# Allegro board ANALYSIS_0218_3.brd
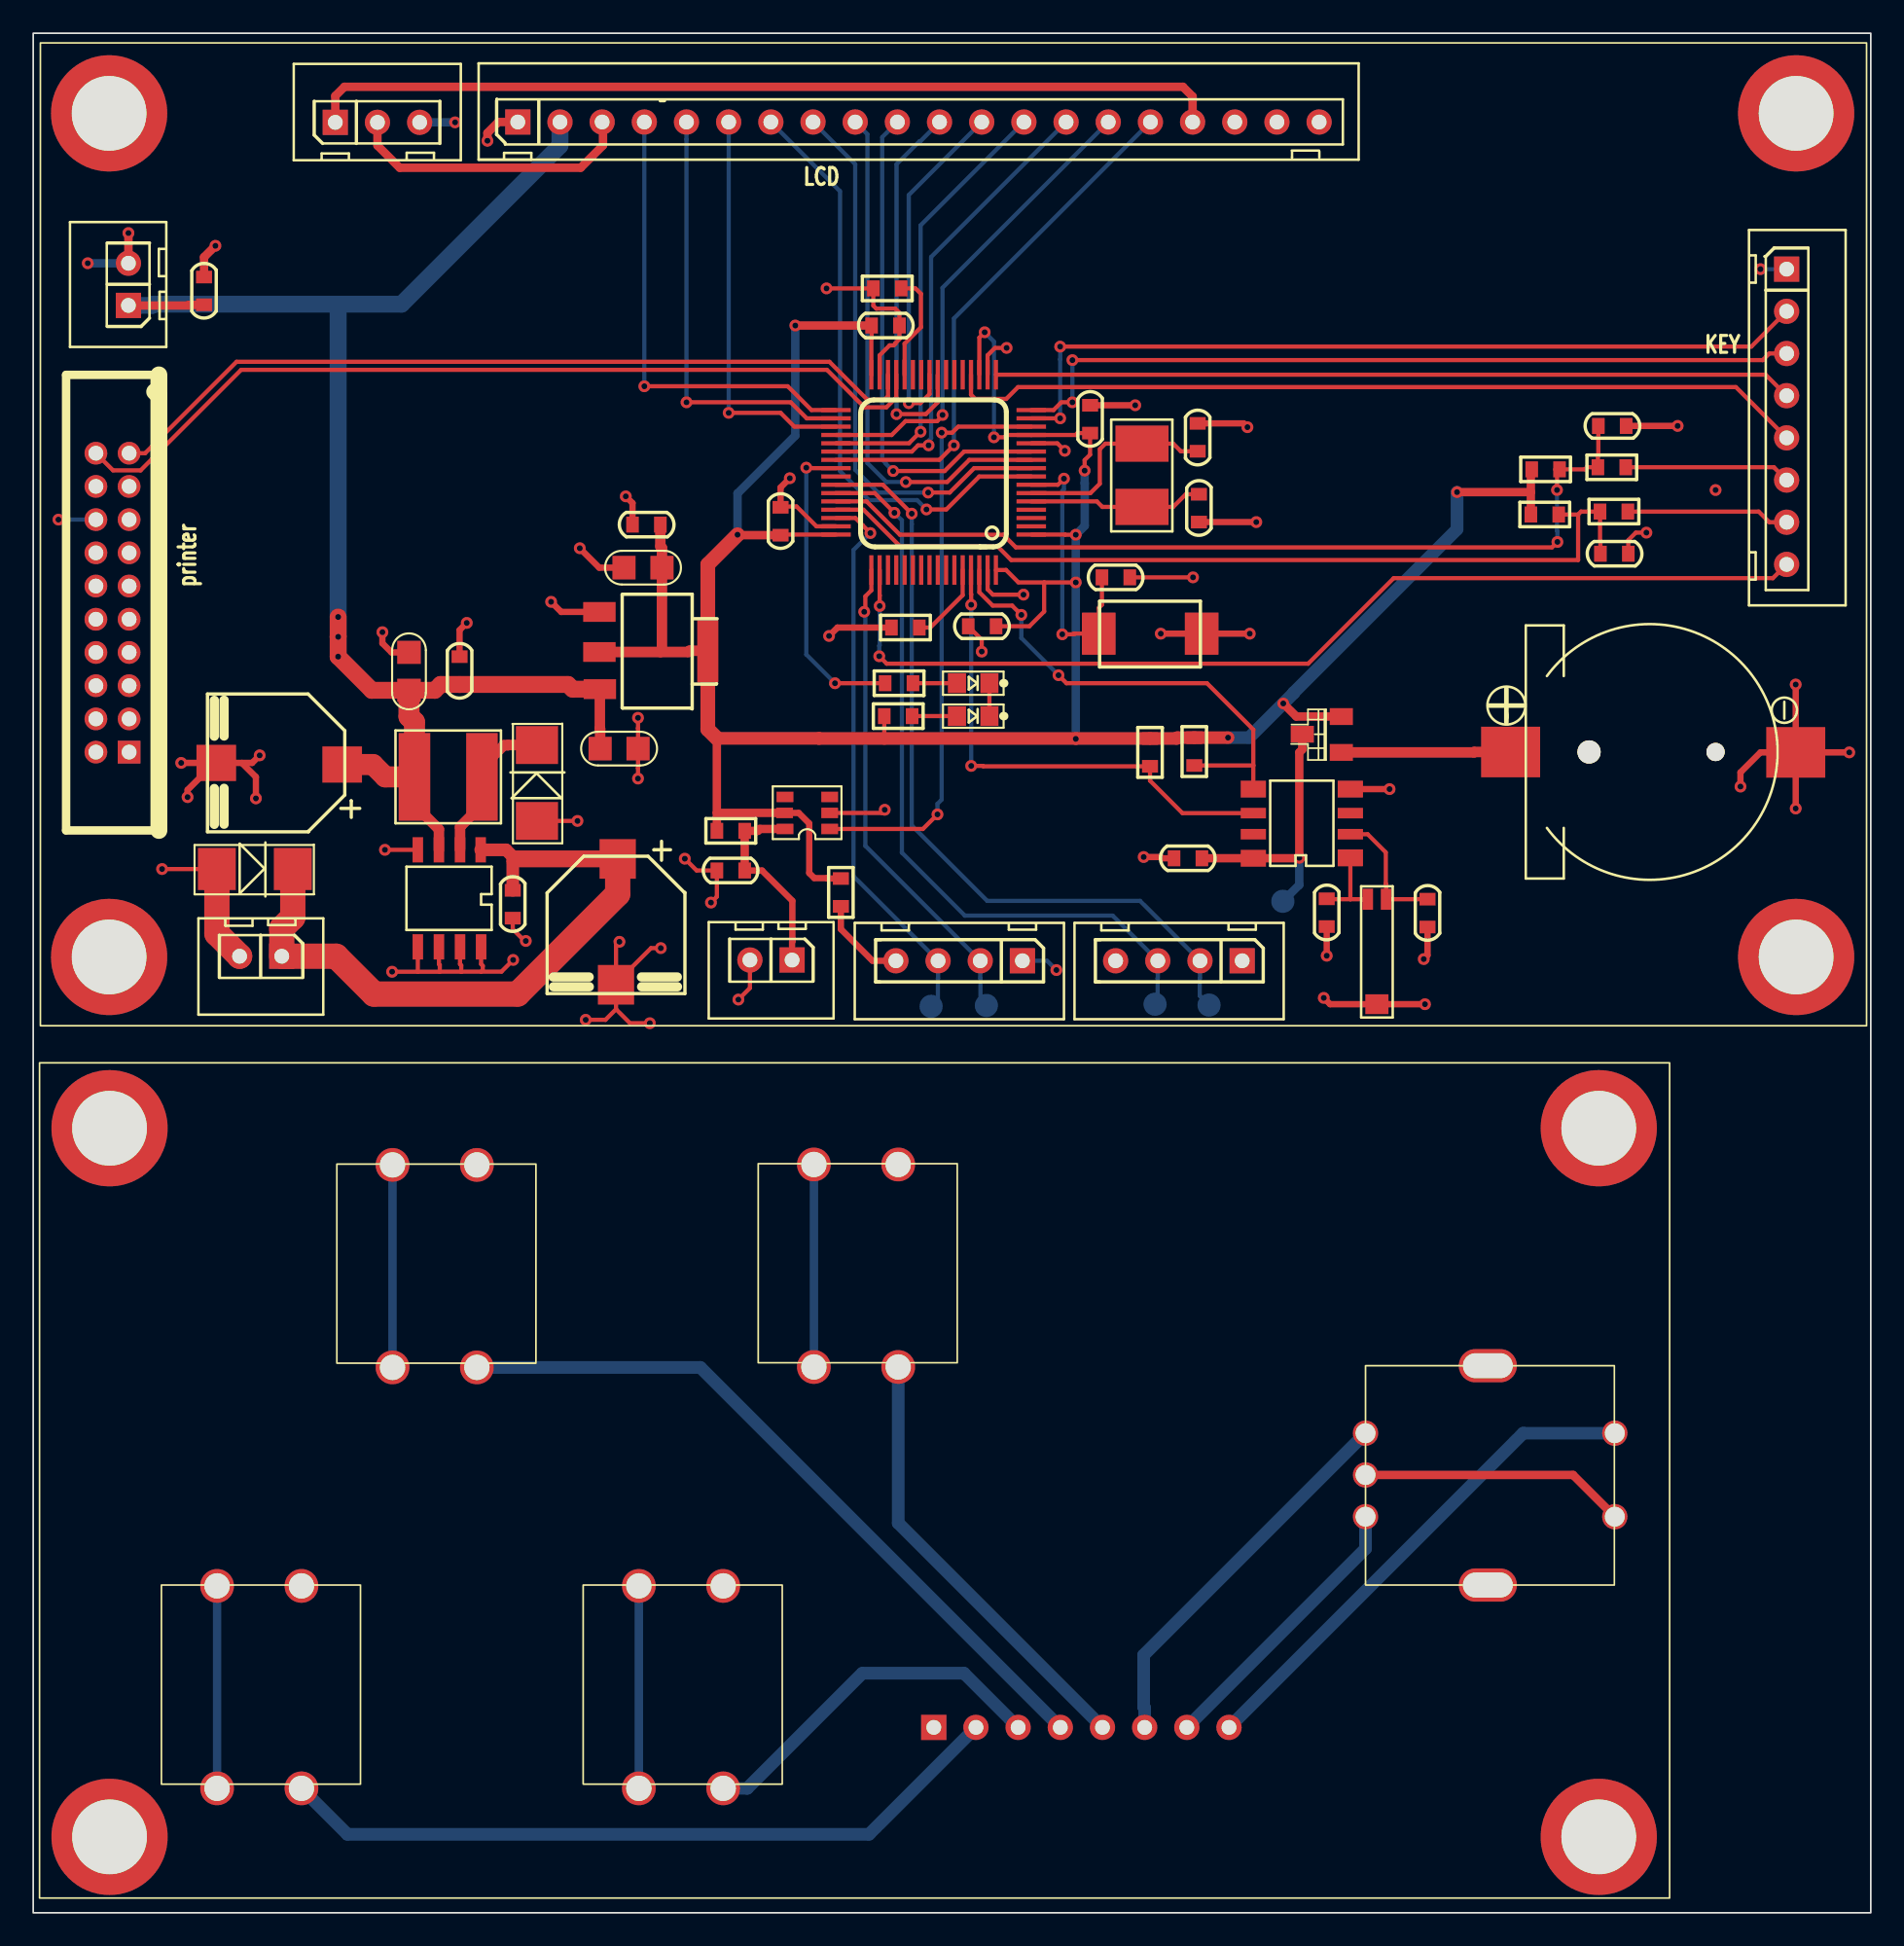
[diagram p0: board, top side]
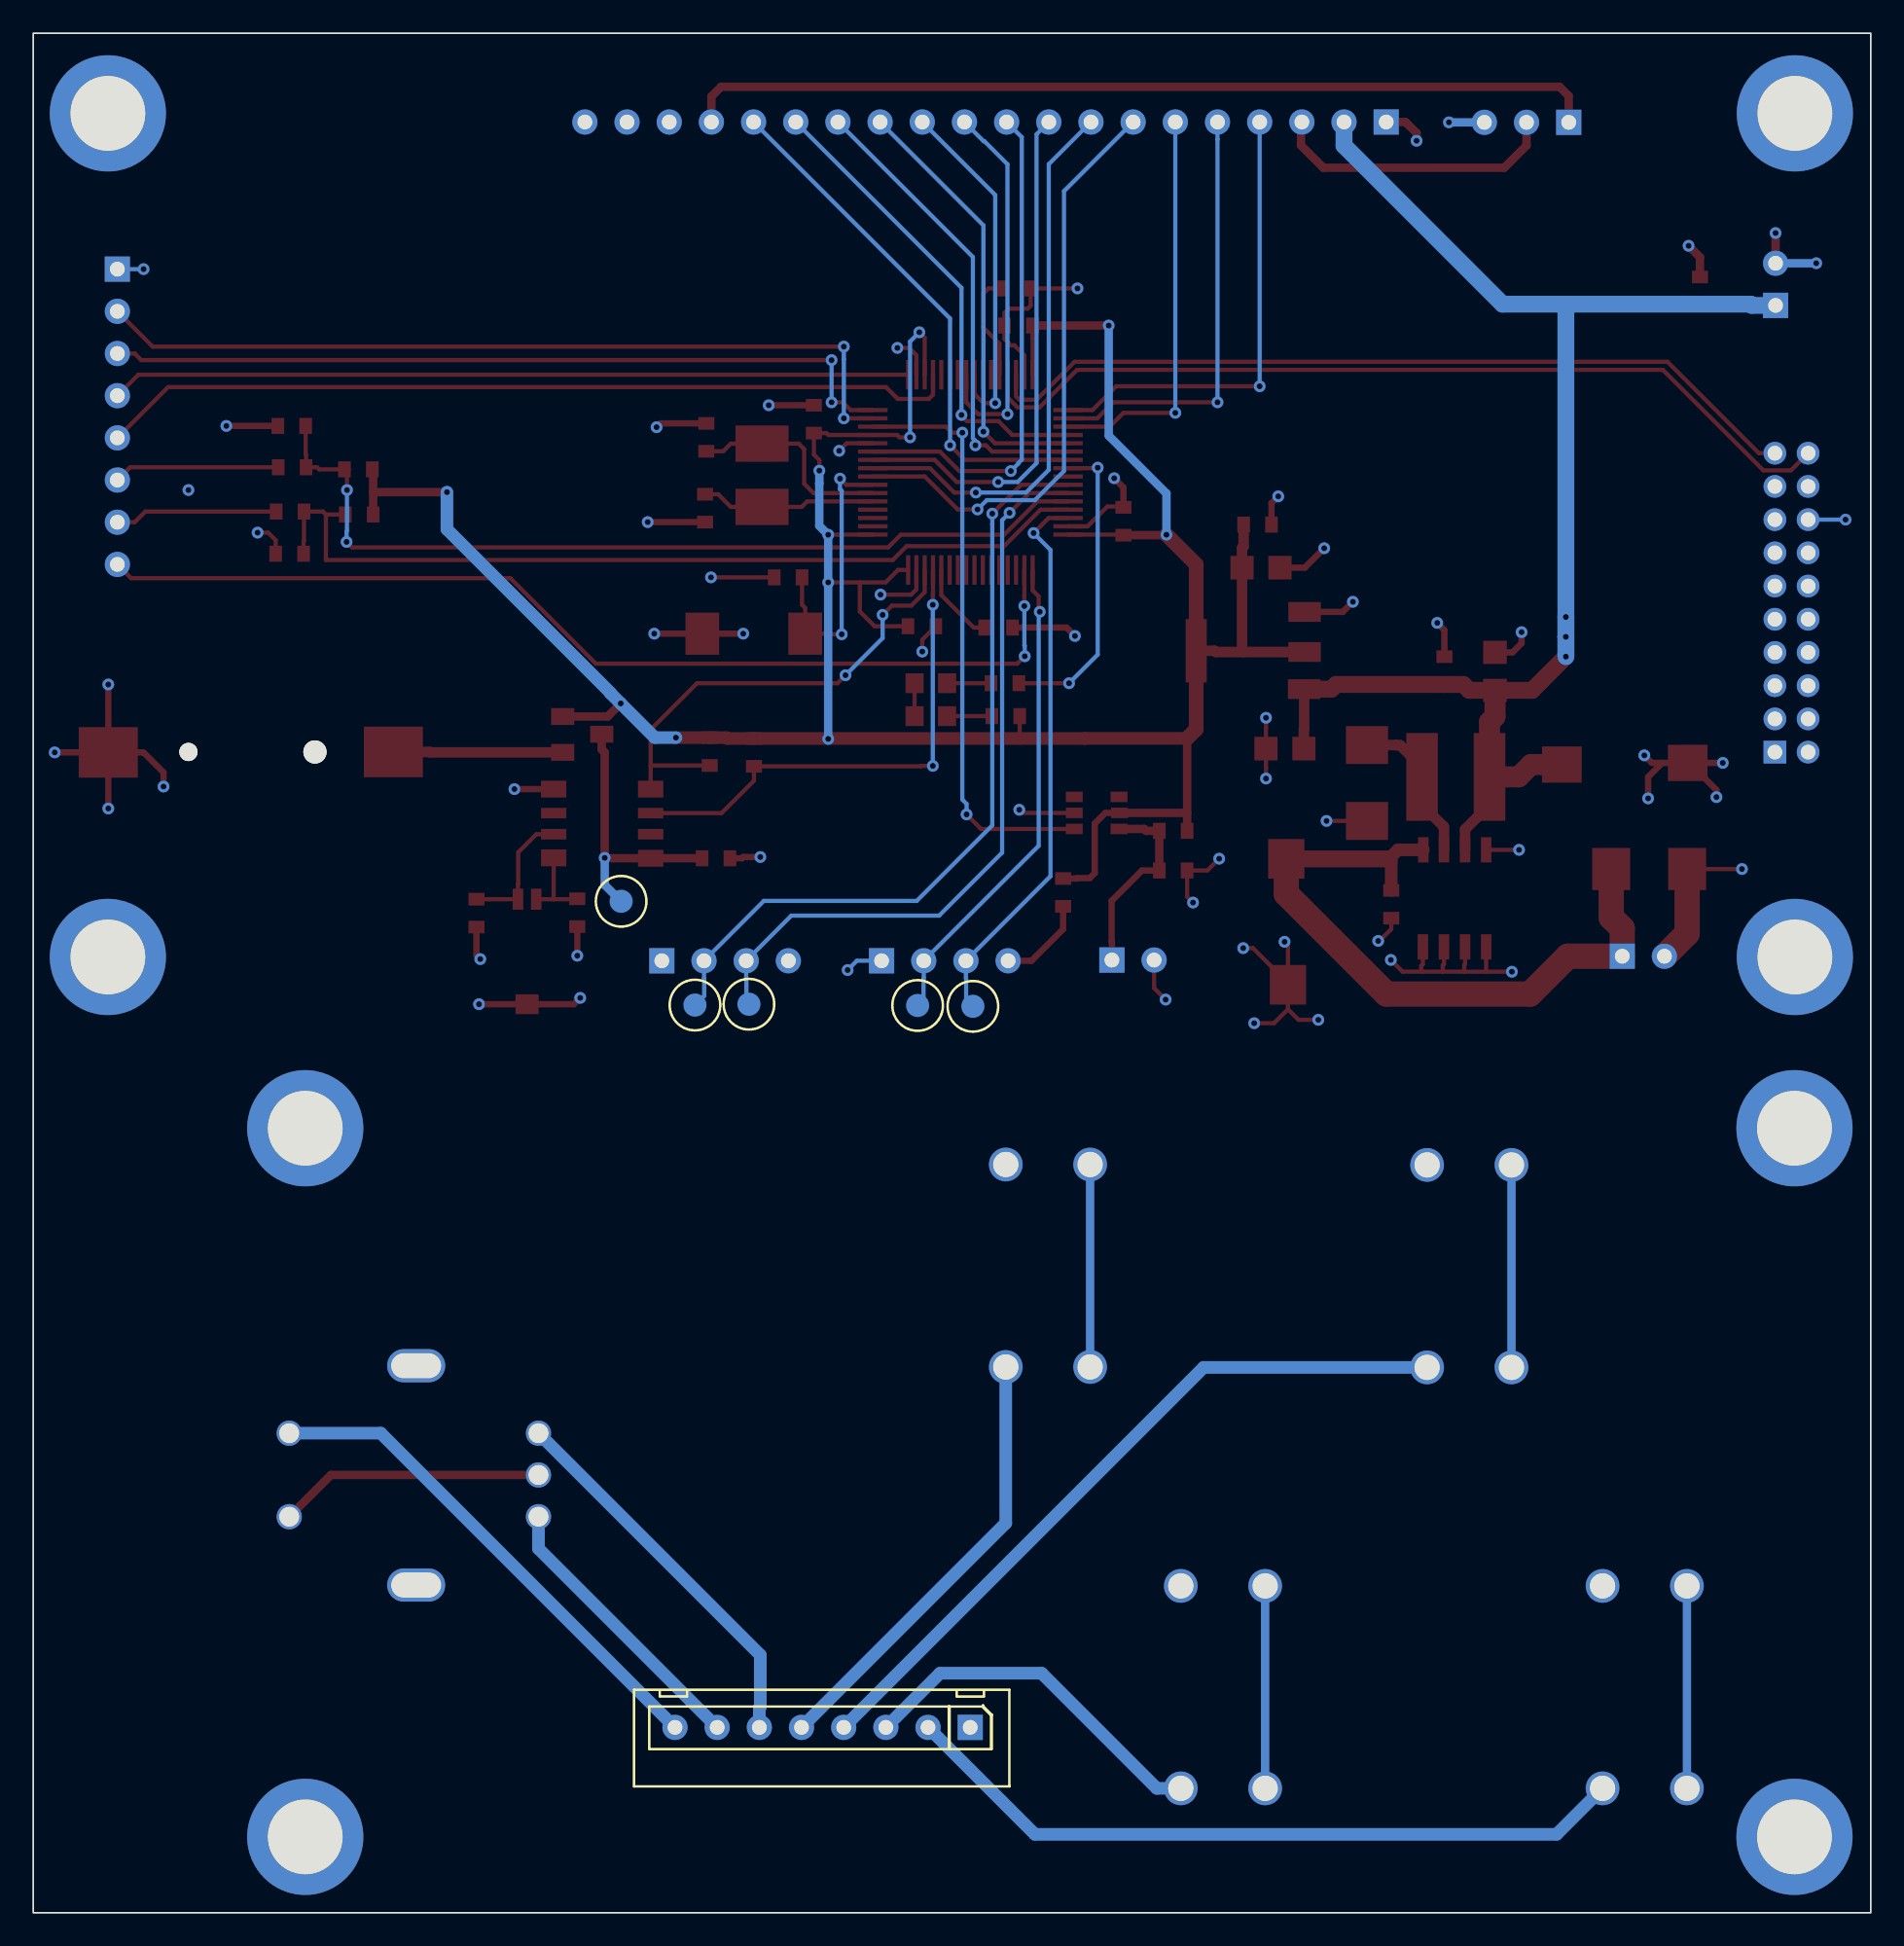
[diagram p1: board, bottom side, seen from below]

Outline 110.67 x 113.18 mm; copper layers: TOP, BOTTOM. Coordinates in mm from the lower left corner of the outline.
Outline path: rectangle 0,0 110.67,113.18

## Placement (name value [footprint] x y rotation side)
C1  0.1uF  [C0603]  51.33 95.58 0 top
C2  0.1uF  [C0603]  63.65 89.94 90 top
C3  0.1uF  [C0603]  45.01 83.79 90 top
C4  0.1uF  [C0603]  10.29 97.66 90 top
C5  0.1uF  [C0603]  42.01 62.76 180 top
C6  0.1uF  [C0603]  57.15 77.47 180 top
C7  15pF  [C0603]  70.13 88.85 270 top
C8  15pF  [C0603]  70.21 84.58 90 top
C9  0.1uF  [C0603]  65.2 80.42 180 top
C10  0.1uF  [C0603]  95.22 81.84 0 top
C11  0.1uF  [C0603]  95.1 89.53 0 top
C12  0.1uF  [C0603]  69.55 63.5 180 top
C13  5pF  [C0603]  83.97 60.2 90 top
C14  5pF  [C0603]  77.9 60.22 90 top
C15  220uf/35V  [CAP_SMD_8X10D5]  40.15 61.64 270 top
C16  0.1uF  [C0603]  28.88 60.73 90 top
C17  220uf/35V  [CAP_SMD_8X10D5]  16.79 64.19 180 top
C18  0.1uF  [C0603]  25.68 74.8 270 top
C19  10uF  [C0805]  22.63 74.76 270 top
C20  10uF  [C0805]  36.72 81 0 top
C21  10uF  [C0805]  35.28 70.1 180 top
C22  0.1uF  [C0603]  36.93 83.59 0 top
D1  BAT54C  [SOT23-3]  77.61 70.97 0 top
D2  SMBJ12A  [SMA]  13.35 62.85 180 top
D3  SS34  [SMA]  30.34 68.03 270 top
H1  NC/mechanical _pad  [HOLE_4D5MM]  4.57 57.56 0 top
H2  NC/mechanical _pad  [HOLE_4D5MM]  4.57 108.36 0 top
H3  NC/mechanical _pad  [HOLE_4D5MM]  106.17 108.36 0 top
H4  NC/mechanical _pad  [HOLE_4D5MM]  106.17 57.56 0 top
H5  NC/mechanical _pad  [HOLE_4D5MM]  4.6 47.24 0 top
H6  NC/mechanical _pad  [HOLE_4D5MM]  4.6 4.57 0 top
H7  NC/mechanical _pad  [HOLE_4D5MM]  94.28 4.57 0 top
H8  NC/mechanical _pad  [HOLE_4D5MM]  94.28 47.24 0 top
J1  HEADER 8  [XH-8A]  54.23 11.15 0 bottom
J2  HEADER 5  [SW3_2]  85.32 26.09 0 top
J3  -  [XH-2A]  5.73 96.79 90 top
J4  HEADER 20X2  [HEADER10X2_2MMP]  4.78 78.89 180 top
J5  HEADER 2  [XH-2A]  45.7 57.37 180 top
J8  HEADER 8  [XH-8A]  105.61 98.98 270 top
J9  LCD  [XH-20A]  32.13 94.59 0 top
JP_1  -  [XH-2A]  14.97 57.6 180 top
JP_SWD1  -  [XH-4A]  59.58 57.33 180 top
JS_BAT1  BAT  [CR1220_SOCKET_V1]  97.26 69.9 270 top
JS_USART1  NC/XH-4A  [XH-4A]  72.81 57.33 180 top
KS_REST  KEY_3x6x2d5_2p_SMD  [KEY_3X6X2D5_2P_SMD]  67.22 77.2 0 top
L1  47UH  [CD54]  24.99 68.4 90 top
LED0  LED  [LED0603]  56.62 72.06 180 top
LED1  LED  [LED0603]  56.62 74.04 180 top
NOREF  -  []  4.6 4.57 90 top
NOREF#2  -  []  0.43 112.6 0 top
NOREF#3  -  []  49.56 39.19 0 top
NOREF#4  -  []  4.57 57.56 90 top
NOREF#5  -  []  0.38 0.89 0 top
NOREF#6  -  []  4.6 4.57 0 top
NOREF#7  -  []  0.43 53.42 90 top
NOREF#8  -  []  49.56 40.23 90 top
NOREF#9  -  []  4.57 108.36 0 top
NOREF#10  -  []  0.38 0.89 90 top
R1  220K  [R0603]  42.01 65.15 180 top
R2  10K  [R0603]  91.03 84.2 180 top
R3  10K  [R0603]  91.08 86.92 180 top
R4  10K  [R0603]  52.53 77.39 0 top
R5  10K  [R0603]  51.43 97.82 0 top
R6  10K  [R0603]  95.07 87.05 180 top
R7  10K  [R0603]  95.2 84.38 180 top
R8  10R  [R0603]  48.64 61.44 90 top
R9  10k  [XH-3A]  18.19 107.82 0 top
R10  10K  [R0603]  67.26 69.88 270 top
R11  10K  [R0603]  69.93 69.93 270 top
R13  3.3K  [R0603]  52.1 72.06 180 top
R14  3.3K  [R0603]  52.15 74.04 180 top
SW1  SW PUSHBUTTON_0  [SW4L]  16.15 7.49 180 top
SW2  SW PUSHBUTTON_0  [SW4L]  41.55 7.49 180 top
SW3  SW PUSHBUTTON_0  [SW4L]  26.72 32.84 180 top
SW4  SW PUSHBUTTON_0  [SW4L]  52.1 32.87 180 top
T1  NC/TEST  [TEST_55C_SMD]  54.08 54.58 180 bottom
T2  NC/TEST  [TEST_55C_SMD]  57.4 54.64 180 bottom
T3  NC/TEST  [TEST_55C_SMD]  75.26 60.91 180 bottom
T4  NC/TEST  [TEST_55C_SMD]  67.56 54.71 180 bottom
T5  NC/TEST  [TEST_55C_SMD]  70.82 54.66 180 bottom
U1  USBLC6-2SC6  [SOT23-6]  46.62 66.23 90 top
U2  STM32F103RB  [LQFP64]  54.23 86.74 180 top
U3  PCF8563T  [SOP8]  79.07 63.68 90 top
U4  XL1509-5.0  [SOIC8]  25.07 61.09 180 top
U5  LM1117-3.3  [SOT-223]  34.15 76 270 top
Y1  8M  [CY5032_2P]  66.78 86.56 90 top
Y2  32.768KHz  [MC_146]  80.92 57.86 270 top

## Library data of the parts
C1-C22 = C
D1 = BAT54C
D2 D3 = DIODE
H1-H8 = PAD
J1 J8 = HEADER 10_0
J2 = 4 HEADER_2
J3 J5 = HEADER 2
J4 = HEADER 10X2_2
J9 = HEADER 22_3
JP_1 = header_3d5_6
JP_SWD1 JS_USART1 = HEADER 4
JS_BAT1 = BATT
KS_REST SW1-SW4 = SW PUSHBUTTON_0
L1 = INDUCTOR_0
LED0 LED1 = LED0603
R1-R8 R10 R11 R13 R14 = R
R9 = R_var_0
T1-T5 = TESTPONT
U1 = USB_MINI_SOCKET_5
U2 = STM32F103
U3 = PCF8563
U4 = XL1509
U5 = 1117
Y1 = CRYSTAL
Y2 = MC_146

## Footprints (pads in the part's own frame, mm; a bottom-side part is the same pattern mirrored in y, then rotated)
C0603
  rect 0.762x0.965 smd: 1(-0.838,0) 2(0.838,0)
C0805
  rect 1.397x1.422 smd: 1(-1.143,0) 2(1.143,0)
CAP_SMD_8X10D5
  rect 2.388x2.184 smd: 1(-1.82,-4.95) 2(5.76,-5.05)
CD54
  rect 5.283x1.905 smd: 1(0,2.032) 2(0,-2.032)
CR1220_SOCKET_V1
  round 1.397 hole 1.397 unplated: (0,-3.556)
  rect 3.048x3.556 smd: 1(0,-8.28) 2(0.025,8.89)
  round 1.092 hole 1.092: 3(0,4.064)
CY5032_2P
  rect 2.184x3.2 smd: 1(-1.905,0) 2(1.905,0)
HEADER10X2_2MMP
  rect 1.372x1.372 hole 0.889: 1(-1,9)
  round 1.372 hole 0.889: 2(1,9) 3(-1,7) 4(1,7) 5(-1,5) 6(1,5) 7(-1,3) 8(1,3) 9(-1,1) 10(1,1) 11(-1,-1) 12(1,-1) 13(-1,-3) 14(1,-3) 15(-1,-5) 16(1,-5) 17(-1,-7) 18(1,-7) 19(-1,-9) 20(1,-9)
HOLE_4D5MM
  round 7 hole 4.5: 1(0,0)
KEY_3X6X2D5_2P_SMD
  rect 2.032x2.54 smd: 1(-3.048,-0.178) 2(3.15,-0.178)
LED0603
  rect 1.092x1.194 smd: 1(0.991,0) 2(-0.965,0)
LQFP64
  rect 1.778x0.254 smd: 1(-5.88,3.749) 2(-5.88,3.251) 3(-5.88,2.751) 4(-5.88,2.25) 5(-5.88,1.75) 6(-5.88,1.25) 7(-5.88,0.749) 8(-5.88,0.249) 9(-5.88,-0.249) 10(-5.88,-0.749) 11(-5.88,-1.25) 12(-5.88,-1.75) 13(-5.88,-2.25) 14(-5.88,-2.751) 15(-5.88,-3.251) 16(-5.88,-3.749) 33(5.88,-3.749) 34(5.88,-3.251) 35(5.88,-2.751) 36(5.88,-2.25) 37(5.88,-1.75) 38(5.88,-1.25) 39(5.88,-0.749) 40(5.88,-0.249) 41(5.88,0.249) 42(5.88,0.749) 43(5.88,1.25) 44(5.88,1.75) 45(5.88,2.25) 46(5.88,2.751) 47(5.88,3.251) 48(5.88,3.749)
  rect 0.254x1.778 smd: 17(-3.749,-5.88) 18(-3.251,-5.88) 19(-2.751,-5.88) 20(-2.25,-5.88) 21(-1.75,-5.88) 22(-1.25,-5.88) 23(-0.749,-5.88) 24(-0.249,-5.88) 25(0.249,-5.88) 26(0.749,-5.88) 27(1.25,-5.88) 28(1.75,-5.88) 29(2.25,-5.88) 30(2.751,-5.88) 31(3.251,-5.88) 32(3.749,-5.88) 49(3.749,5.88) 50(3.251,5.88) 51(2.751,5.88) 52(2.25,5.88) 53(1.75,5.88) 54(1.25,5.88) 55(0.749,5.88) 56(0.249,5.88) 57(-0.249,5.88) 58(-0.749,5.88) 59(-1.25,5.88) 60(-1.75,5.88) 61(-2.25,5.88) 62(-2.751,5.88) 63(-3.251,5.88) 64(-3.749,5.88)
MC_146
  rect 1.27x0.635 smd: 1(-3.173,0.55) 2(-3.173,-0.55)
  rect 1.194x1.397 smd: 3(3.15,0)
R0603
  rect 0.762x0.965 smd: 1(-0.838,0) 2(0.838,0)
SMA
  rect 2.286x2.54 smd: 1(2.286,0) 2(-2.286,0)
SOIC8
  rect 0.635x1.524 smd: 1(-1.88,-2.921) 2(-0.635,-2.921) 3(0.635,-2.921) 4(1.905,-2.921) 5(1.905,2.921) 6(0.635,2.921) 7(-0.635,2.921) 8(-1.905,2.921)
SOP8
  rect 1.016x1.524 smd: 1(-0.152,-0.254) 4(3.988,-0.254) 5(3.988,5.588) 8(-0.178,5.588)
  rect 0.635x1.524 smd: 2(1.27,-0.254) 3(2.54,-0.254) 6(2.54,5.588) 7(1.27,5.588)
SOT23-3
  rect 1.397x1.016 smd: 1(1.168,-1.092) 2(1.168,1.067) 3(-1.181,0)
SOT23-6
  rect 0.635x1.016 smd: 1(-0.965,-1.346) 2(0,-1.346) 3(0.965,-1.346) 4(0.965,1.346) 5(0,1.372) 6(-0.965,1.346)
SOT-223
  rect 1.194x1.956 smd: 1(-2.337,-0.051) 2(0.076,-0.051) 3(2.311,-0.025)
  rect 3.81x1.27 smd: 4(0,6.477)
SW3_2
  round 1.524 hole 1.194: 1(-5.08,2.794) 2(-5.08,0.279) 3(-5.08,-2.235) 4(9.931,2.794) 5(9.931,-2.235)
  oval 3.5x2 hole 3x1.5: 6(2.286,6.858) 7(2.286,-6.35)
SW4L
  round 2.032 hole 1.524: 1(0,0) 2(0,-12.192) 3(5.08,0) 4(5.08,-12.192)
TEST_55C_SMD
  round 1.397 smd: 1(0,0)
XH-2A
  rect 1.524x1.524 hole 0.889: 1(0,0)
  round 1.524 hole 0.889: 2(2.54,0)
XH-3A
  rect 1.524x1.524 hole 0.889: 1(0,0)
  round 1.524 hole 0.889: 2(2.54,0) 3(5.08,0)
XH-4A
  rect 1.524x1.524 hole 0.889: 1(0,0)
  round 1.524 hole 0.889: 2(2.54,0) 3(5.08,0) 4(7.62,0)
XH-8A
  rect 1.524x1.524 hole 0.889: 1(0.005,-0.013)
  round 1.524 hole 0.889: 2(2.545,-0.013) 3(5.085,-0.013) 4(7.625,-0.013) 5(10.165,-0.013) 6(12.705,-0.013) 7(15.245,-0.013) 8(17.785,-0.013)
XH-20A
  rect 1.524x1.524 hole 0.889: 1(-2.942,13.25)
  round 1.524 hole 0.889: 2(-0.402,13.25) 3(2.138,13.25) 4(4.678,13.25) 5(7.218,13.25) 6(9.758,13.25) 7(12.298,13.25) 8(14.838,13.25) 9(17.378,13.25) 10(19.918,13.25) 11(22.458,13.25) 12(24.998,13.25) 13(27.538,13.25) 14(30.078,13.25) 15(32.618,13.25) 16(35.158,13.25) 17(37.698,13.25) 18(40.238,13.25) 19(42.778,13.25) 20(45.318,13.25)

## Nets
GND: C1.2 C2.2 C3.2 C4.2 C5.2 C6.2 C7.1 C8.1 C9.1 C10.2 C11.2 C12.2 C13.1 C14.1 C15.2 C16.1 C17.2 C18.1 C19.1 C20.1 C21.1 C22.1 D2.1 D3.1 J1.1 J2.2(G1) J2.5(G2) J3.2 J4.16(GND) J5.2 J8.1 J9.1(VSS) JP_1.2 JP_SWD1.1 JS_BAT1.2(-) JS_USART1.1 KS_REST.2 LED0.2(CATHODE) LED1.2(CATHODE) R4.1 R5.1 R9.3 SW1.3 SW1.4 SW2.3 SW2.4 SW3.3 SW3.4 SW4.3 SW4.4 U1.2(GND) U2.12(VSSA) U2.18(VSS_4) U2.31(VSS_1) U2.47(VSS_2) U2.63(VSS_3) U3.4(VSS) U4.4(EN) U4.5(GND1) U4.6(GND2) U4.7(GND3) U4.8(GND4) U5.1 Y2.3(GND)
VCC_5V: C4.1 C17.1 C18.2 C19.2 C21.2 J3.1 J9.2(VDD) L1.1 U4.3(FB) U5.3(IN)
VCC_9V: C15.1 C16.2 D2.2 JP_1.1 U4.1(VIN)
VDD_3V3: C1.1 C2.1 C3.1 C6.1 C20.2 C22.2 D1.2(C2) R1.2 R2.2 R3.2 R8.2 R10.1 R11.1 R13.2 U1.5(VBUS) U2.1(VBAT) U2.13(VDDA) U2.19(VDD_4) U2.32(VDD_1) U2.48(VDD_2) U2.64(VDD_3) U5.2(OUT) U5.4
/CS1: J9.15(CS) U2.36(PB15/TIM1_CH3N/SPI2_MOSI)
/RD: J9.6(RD) U2.35(PB14/TIM1_CH2N/SPI2_MISO)
/RST: J9.16(REST) U2.39(PC8/TIM3_CH3)
/WR: J9.5(WR) U2.34(PB13/TIM1_CH1N/SPI2_SCK)
BOOT0: R4.2 U2.60(BOOT0)
BOOT1: R5.2 U2.28(PB2/BOOT1)
DB0: J9.7(D0) U2.8(PC0/ADC12_IN10)
DB1: J9.8(D1) U2.9(PC1/ADC12_IN11)
DB2: J9.9(D2) U2.10(PC2/ADC12_IN12)
DB3: J9.10(D3) U2.11(PC3/ADC12_IN13)
DB4: J9.11(D4) U2.24(PC4/ADC12_IN14)
DB5: J9.12(D5) U2.25(PC5/ADC12_IN15)
DB6: J9.13(D6) U2.37(PC6/TIM3_CH1)
DB7: J9.14(D7) U2.38(PC7/TIM3_CH2)
EC11_A: C11.1 R3.1 R6.2 U2.44(PA11/USART1_CTS/CANRX/TIM1_CH4/)
EC11_B: C10.1 R2.1 R7.2 U2.45(PA12/USART1_RTS/CANTX/TIM1_ETR/)
EC11_C: J8.8 U2.50(PA15/JTDI/TIM2_CH1_ETR/SPI1_NSS)
EC11_K: J1.8 J2.4(KEY)
I2C1_SCL: R10.2 U2.61(PB8/I2C1_SCL/CANRX) U3.6(SCL)
I2C1_SDA: R11.2 U2.62(PB9/I2C1_SDA/CANTX) U3.5(SDA)
KEY1: J1.2 SW1.1
KEY2: J1.3 SW2.1
KEY3: J1.4 SW3.1
KEY4: J1.5 SW4.1
KEY_1: J8.2 U2.15(PA1/USART2_RTS/ADC12_IN1/TIM2_C)
KEY_2: J8.3 U2.16(PA2/USART2_TX/ADC12_IN2/TIM2_CH)
KEY_3: J8.4 U2.17(PA3/USART2_RX/ADC12_IN3/TIM2_CH)
KEY_4: J8.5 U2.20(PA4/SPI1_NSS/USART2_CK/ADC12_IN)
PC9_LED0: R14.2 U2.40(PC9/TIM3_CH4)
RS: J9.4(A0) U2.33(PB12/TIM1_BKIN/SPI2_NSS)
STM32_REST: C9.2 KS_REST.1 U2.7(NRST)
SWCLK: JP_SWD1.2 T2.1 U2.49(PA14/JTCK/SWCLK)
SWDIO: JP_SWD1.3 T1.1 U2.46(PA13/JTMS/SWDIO)
USART1_RX_PA10: JS_USART1.3 T4.1 U2.43(PA10/USART1_RX/TIM1_CH3)
USART1_TX_PA9: JS_USART1.2 T5.1 U2.42(PA9/USART1_TX/TIM1_CH2)
USART3_RXD: J4.19(TXD) U2.30(PB11/TIM2_CH4/USART3_RX)
USART3_TXD: J4.20(RXD) U2.29(PB10/TIM2_CH3/USART3_TX)
N201627: C12.1 D1.3(A) T3.1 U3.8(VDD)
N201649: C14.2 U3.1(OSCI) Y2.2
N202031: JP_SWD1.4 R8.1
N202175: C7.2 U2.6(PD1 OSC_OUT/CANTX) Y1.2
N202187: C8.2 U2.5(PD0 OSC_IN/CANRX) Y1.1
N202733: D1.1(C1) JS_BAT1.1(+)
N203157: C13.2 U3.2(OSCO) Y2.1
N208876: D3.2 L1.2 U4.2(OUTPUT)
N211508: U1.1(I/O1) U2.14(PA0-WKUP/USART2_CTS/ADC12_IN0/T)
N214712: C5.1 J5.1 R1.1 U1.6(I/O1X)
N217465: J8.7 R7.1
N217476: J8.6 R6.1
N235811: J1.7 J2.3(B)
N235857: J1.6 J2.1(A)
N261648: J9.17(VEE) R9.1
N261718: J9.3(V0) R9.2
N265241: LED1.1(ANODE) R14.1
N2654610: LED0.1(ANODE) R13.1

Pads without a net: H1 1; H2 1; H3 1; H4 1; H5 1; H6 1; H7 1; H8 1; J2 6 7; J4 1 2 3 4 5 6 7 8 9 10 11 12 13 14 15 17 18; J9 18 19 20; JS_BAT1 3; JS_USART1 4; SW1 2; SW2 2; SW3 2; SW4 2; U1 3 4; U2 2 3 4 21 22 23 26 27 41 51 52 53 54 55 56 57 58 59; U3 3 7

## Via types
v1: diameter 0.711, hole 0.356, TOP to BOTTOM, 109 vias

## Routing (per net, layer and track width the routed paths; a pad name or vN(x,y) marks a point on that pad's centre or on a via; arc(x,y) is an arc through that point)
GND: length 245.3
  TOP w0.254: 23.17,56.67 v1(21.62,56.67) ; 23.17,56.67 23.16,56.67 U4.5 ; 23.17,56.67 24.48,56.67 24.49,56.67 ; D2.1 v1(7.76,62.85) ; C10.2 96.06,82.65 96.52,83.11 v1(97.16,83.11) ; v1(28.91,57.38) 28.2,56.67 26.98,56.67 ; v1(35.31,58.47) 35.1,58.27 35.1,55.98 ; 24.49,56.67 24.49,57.07 24.43,57.12 U4.6 ; 24.49,56.67 25.78,56.67 25.78,56.67 ; 35.1,54.41 34.46,53.77 v1(33.27,53.77) ; 35.1,54.41 35.94,53.57 v1(37.13,53.57) ; 35.1,54.41 C15.2 35.1,55.98 ; 25.78,56.67 25.78,57.05 25.7,57.12 U4.7 ; 25.78,56.67 26.98,56.67 ; C6.2 57.12,76.66 v1(57.12,75.95) ; v1(58.62,94.23) 57.92,94.23 57.48,93.79 U2.18 ; U2.47 47.17,83.49 45.97,84.68 45.06,84.68 C3.2 ; J5.2 43.16,55.68 v1(42.47,54.99) ; D3.1 v1(32.78,65.75) ; v1(39.24,63.47) 39.95,62.76 C5.2 41.17,61.19 v1(40.82,60.83) ; v1(51.28,66.42) 51.09,66.23 U1.2 ; U2.31 50.98,93.79 51.57,94.39 51.83,94.39 51.92,94.48 51.92,94.51 52.17,94.77 C1.2 52.17,96.34 51.92,96.6 50.78,96.6 50.6,96.78 R5.1 v1(47.78,97.82) ; 35.1,55.98 37.21,58.09 v1(37.8,58.09) ; U4.8 26.97,57.12 27.08,57.02 27.08,56.77 26.98,56.67 ; C9.1 v1(69.85,80.42) ; U2.63 57.48,79.69 57.8,79.38 v1(59.64,79.38) ; v1(62.13,88.04) 61.67,88.49 U2.12 ; v1(36.42,71.96) 36.42,71.32 36.43,71.32 C21.1 36.43,68.94 36.42,68.94 v1(36.42,68.3) ; U4.4 v1(21.18,64.01) ; C16.1 28.88,59.23 29.59,58.52 v1(29.67,58.52) ; LED1.2 LED0.2
  TOP w0.381: 12.56,69.24 C17.2 10.92,69.24 ; 12.56,69.24 13.19,69.24 v1(13.64,69.7) ; 12.56,69.24 13.41,68.39 v1(13.41,67.11) ; U5.1 31.8,78.33 v1(31.19,78.94) ; JS_BAT1.2 v1(106.15,66.5) ; JS_BAT1.2 104.03,69.88 102.82,68.67 v1(102.82,67.82) ; JS_BAT1.2 v1(106.15,73.96) ; JS_BAT1.2 v1(109.37,69.88) ; U3.4 v1(81.69,67.67) ; v1(47.93,76.89) 48.44,77.39 R4.1 ; v1(26.11,77.67) 25.68,77.24 C18.1 ; v1(9.3,67.18) 9.3,67.61 10.92,69.24 ; C14.1 v1(77.9,57.63) ; v1(73.27,77.03) KS_REST.2 v1(67.91,77.03) ; v1(77.72,55.09) 78.1,54.71 Y2.3 v1(83.82,54.71) ; v1(21.03,77.11) 21.03,76.45 21.58,75.9 C19.1 ; C20.1 34.09,81 v1(32.92,82.17) ; C11.2 v1(99.03,89.53) ; v1(8.91,69.24) 10.92,69.24 ; C12.2 67.98,63.5 67.91,63.58 v1(66.88,63.58) ; v1(45.57,86.39) 45.01,85.83 C3.2 ; C2.2 v1(66.37,90.78) ; v1(73.13,89.46) 72.9,89.69 C7.1 ; C13.1 83.97,57.66 v1(83.74,57.43) ; C8.1 v1(73.66,83.74) ; v1(35.69,85.29) 36.09,84.89 C22.1
  TOP w0.508: J3.2 v1(5.73,101.15) ; v1(10.97,100.38) 10.29,99.7 C4.2 ; J2.2 92.74,26.37 J2.5 ; J9.1 28.02,107.83 27.36,107.17 v1(27.36,106.71)
  TOP w1.524: JP_1.2 11.06,58.97 D2.1
  BOTTOM w0.254: JP_SWD1.1 61.06,57.33 v1(61.62,56.77) ; J4.16 v1(1.52,83.89) ; J8.1 v1(104.02,98.98)
  BOTTOM w0.508: J3.2 v1(3.28,99.33) ; SW3.4 SW3.3 ; SW4.4 SW4.3 ; R9.3 v1(25.41,107.82) ; SW1.4 SW1.3 ; SW2.4 SW2.3
  vias: v1(101.32,85.67)
VCC_5V: length 95
  TOP w0.508: C4.1 9.4,96.82 9.36,96.79 J3.1
  TOP w0.635: U5.3 34.12,71.3 34.14,71.29 C21.2 ; L1.1 22.96,66.71 24.43,65.24 U4.3
  TOP w1.016: U5.3 32.49,73.69 32.21,73.96 C18.2 24.54,73.96 24.18,73.61 C19.2 20.39,73.61 v1(18.36,75.64) v1(18.36,76.83) v1(18.36,78.03)
  TOP w1.27: C17.1 20.46,69.14 21.2,68.4 L1.1 22.96,71.7 22.63,72.03 C19.2
  BOTTOM w1.016: 18.36,96.87 22.18,96.87 31.72,106.41 J9.2 ; 18.36,96.87 7.23,96.87 7.16,96.79 J3.1 ; 18.36,96.87 v1(18.36,78.03) v1(18.36,76.83) v1(18.36,75.64)
VCC_9V: length 41.7
  TOP w0.762: U4.1 28.47,64.01 29.02,63.46 28.88,63.32 C16.2
  TOP w1.016: C15.1 29.02,63.46
  TOP w1.524: C15.1 35.2,61.35 29.17,55.32 20.52,55.32 18.24,57.6 JP_1.1 14.97,59.28 15.63,59.94 D2.2
VDD_3V3: length 182.7
  TOP w0.254: v1(57.3,95.17) 56.98,94.85 U2.19 ; v1(63.32,86.84) 63.32,87.48 63.65,87.81 C2.1 62.89,89.1 62.78,88.99 U2.13 58.64,88.99 58.5,88.85 v1(57.86,88.85) ; v1(62.79,82.98) 62.15,82.98 62.14,82.99 U2.1 ; R13.2 51.26,70.71 ; 62.79,70.71 v1(62.79,70.69) ; C1.1 50.5,94.82 50.48,94.8 U2.32 ; 60.88,80.11 59.33,80.11 58.59,80.86 U2.64 ; 60.88,80.11 v1(62.79,80.11) ; 60.88,80.11 60.88,78.36 59.99,77.47 C6.1 ; C3.1 45.01,82.99 U2.48
  TOP w0.381: R8.2 47.82,62.28 47.79,62.31 47.04,62.31 46.74,62.61 46.74,65.6 46.1,66.23 U1.5
  TOP w0.508: U1.5 41.19,66.23 41.17,66.24 ; 90.2,85.55 90.2,86.87 R3.2 ; 90.2,85.55 v1(85.75,85.55) ; 90.2,85.55 R2.2 ; 41.17,66.24 41.17,70.72 ; 41.17,66.24 R1.2 ; C3.1 42.44,82.96 v1(42.42,82.98) ; v1(75.29,72.82) 76.07,72.03 D1.2 ; C1.1 v1(45.9,95.58)
  TOP w0.635: C22.2 37.77,82.28 37.87,82.18 C20.2 37.87,76.02 37.77,75.92 ; U5.2 37.77,75.92 ; 37.77,75.92 39.45,75.92 39.52,76 U5.4
  TOP w0.762: v1(71.96,70.76) R11.1 68.91,70.76 68.86,70.71 R10.1 47.33,70.71 47.32,70.72 41.17,70.72
  TOP w0.889: v1(42.42,82.98) 40.63,81.19 U5.4 40.63,71.27 41.17,70.72
  BOTTOM w0.254: v1(57.3,95.17) 57.86,94.62 v1(57.86,88.85)
  BOTTOM w0.508: v1(42.42,82.98) 42.42,85.47 45.9,88.95 v1(45.9,95.58) ; v1(62.79,70.69) v1(62.79,80.11) v1(62.79,82.98) 63.33,83.52 63.33,86.08 63.32,86.08 v1(63.32,86.84)
  BOTTOM w0.762: v1(85.75,85.55) 85.75,83.31 75.91,73.48 75.91,73.45 v1(75.29,72.82) 73.23,70.76 v1(71.96,70.76)
/CS1: length 28.7
  TOP w0.254: v1(54.76,90.2) 54.76,90.14 54.44,89.82 52.54,89.82 51.7,88.99 U2.36
  BOTTOM w0.254: J9.15 54.76,97.85 v1(54.76,90.2)
/RD: length 24.3
  TOP w0.254: U2.35 45.84,89.49 45.01,90.32 v1(41.88,90.32)
  BOTTOM w0.254: J9.6 v1(41.88,90.32)
/RST: length 31.8
  TOP w0.254: U2.39 54.57,87.49 v1(55.45,88.37)
  BOTTOM w0.254: v1(55.45,88.37) 55.45,96 J9.16
/WR: length 26.3
  TOP w0.254: v1(39.34,90.96) 45.62,90.96 46.58,89.99 U2.34
  BOTTOM w0.254: v1(39.34,90.96) 39.34,106.79 J9.5
BOOT0: length 4.9
  TOP w0.254: U2.60 55.98,79.35 54.03,77.39 R4.2
BOOT1: length 6.6
  TOP w0.254: U2.28 52.48,94.49 53.47,95.48 53.47,97.49 53.14,97.82 R5.2
DB0: length 36
  TOP w0.254: v1(53.8,84.51) 54.99,84.51 56.98,86.49 U2.8
  BOTTOM w0.254: J9.7 48.59,103.67 48.59,86.82 50.34,85.06 53.24,85.06 v1(53.8,84.51)
DB1: length 33.8
  TOP w0.254: U2.9 56.66,86.99 55.19,85.52 v1(53.9,85.52)
  BOTTOM w0.254: v1(53.9,85.52) 50.88,85.52 49.5,86.89 49.5,105.29 J9.8
DB2: length 31.7
  TOP w0.254: v1(52.55,86.16) 55.04,86.16 56.37,87.49 U2.10
  BOTTOM w0.254: v1(52.55,86.16) 51.38,86.16 50.24,87.3 50.24,107.1 J9.9
DB3: length 30.5
  TOP w0.254: U2.11 56.06,87.99 54.89,86.82 v1(51.79,86.82)
  BOTTOM w0.254: J9.10 51.13,106.92 51.13,87.5 51.34,87.29 51.34,87.27 v1(51.79,86.82)
DB4: length 23.1
  TOP w0.254: v1(51.99,90.25) 53.76,90.25 54.48,90.96 U2.24
  BOTTOM w0.254: J9.11 53.43,106.68 53.38,106.68 51.99,105.29 v1(51.99,90.25)
DB5: length 21.4
  TOP w0.254: v1(52.73,90.91) 53.43,90.91 53.98,91.45 U2.25
  BOTTOM w0.254: v1(52.73,90.91) 52.73,103.44 J9.12
DB6: length 26.6
  TOP w0.254: U2.37 52.74,88.49 v1(53.44,89.19)
  BOTTOM w0.254: J9.13 53.44,101.61 v1(53.44,89.19)
DB7: length 28.6
  TOP w0.254: v1(53.92,88.37) 53.29,88.37 52.91,87.99 U2.38
  BOTTOM w0.254: J9.14 54.08,99.71 54.08,88.79 53.95,88.67 53.95,88.4 v1(53.92,88.37)
EC11_A: length 54.3
  TOP w0.254: C11.1 94.26,87.83 94.23,87.81 R6.2 93.57,87.05 93.45,86.92 R3.1 91.67,86.92 91.77,86.82 v1(91.77,85.67) ; U2.44 50.19,84.99 52.2,82.98 58.42,82.98 59.18,82.22 91.47,82.22 v1(91.8,82.55)
  BOTTOM w0.254: v1(91.8,82.55) 91.8,83.19 91.77,83.21 v1(91.77,85.67)
EC11_B: length 53.8
  TOP w0.254: 93.04,84.2 R2.1 ; 93.04,84.2 93.04,81.46 93.04,81.46 58.9,81.46 58.06,82.3 52.2,82.3 50,84.49 U2.45 ; 93.04,84.2 93.22,84.38 R7.2 94.36,82.63 94.39,82.6 C10.1
EC11_C: length 62.5
  TOP w0.254: U2.50 50.98,79.33 50.98,79.32 v1(50.98,78.69) ; v1(50.95,75.67) 51.4,75.22 76.78,75.22 81.93,80.37 104.77,80.37 J8.8
  BOTTOM w0.254: v1(50.95,75.67) 50.95,76.3 50.98,76.33 v1(50.98,78.69)
EC11_K: length 30.6
  BOTTOM w0.762: J2.4 89.73,28.88 J1.8
I2C1_SCL: length 30.5
  TOP w0.254: v1(56.49,78.77) 56.49,79.4 56.48,79.41 U2.61 ; U3.6 69.22,66.22 67.26,68.17 R10.2 57.23,69.04 57.2,69.06 v1(56.49,69.06)
  BOTTOM w0.254: v1(56.49,78.77) v1(56.49,69.06)
I2C1_SDA: length 29.2
  TOP w0.254: v1(59.51,78.16) 58.95,78.71 57.78,78.71 56.98,79.52 U2.62 ; v1(61.75,74.52) 62.23,74.04 70.69,74.04 73.48,71.25 73.48,69.09 ; 73.48,69.09 U3.5 ; 73.48,69.09 R11.2
  BOTTOM w0.254: v1(59.51,78.16) 59.51,76.76 v1(61.75,74.52)
KEY1: length 44.4
  BOTTOM w0.762: SW1.1 18.92,4.72 50.34,4.72 J1.2
KEY2: length 22
  BOTTOM w0.762: J1.3 56.05,14.43 49.94,14.43 43,7.49 SW2.1
KEY3: length 44.1
  BOTTOM w0.762: SW3.1 40.18,32.84 J1.4
KEY4: length 26.8
  BOTTOM w0.762: J1.5 52.1,23.47 SW4.1
KEY_1: length 50.7
  TOP w0.254: v1(61.85,94.31) 103.47,94.31 J8.2 ; U2.15 v1(61.85,89.99)
  BOTTOM w0.254: v1(61.85,94.31) 61.85,93.55 61.85,93.55 v1(61.85,89.99)
KEY_2: length 48.4
  TOP w0.254: v1(62.59,90.96) 61.92,90.96 61.45,90.49 U2.16 ; J8.3 104.56,93.9 104.16,93.5 v1(62.59,93.5)
  BOTTOM w0.254: v1(62.59,90.96) v1(62.59,93.5)
KEY_3: length 48.1
  TOP w0.254: U2.17 104.34,92.62 J8.4
KEY_4: length 52
  TOP w0.254: U2.20 56.48,91.42 56.73,91.16 58.6,91.16 59.31,91.87 102.54,91.87 J8.5
PC9_LED0: length 18.5
  TOP w0.254: v1(48.29,74.04) R14.2 ; v1(46.56,87.02) 46.59,86.99 U2.40
  BOTTOM w0.254: v1(46.56,87.02) 46.56,75.77 v1(48.29,74.04)
RS: length 28
  TOP w0.254: v1(36.8,91.92) 45.44,91.92 46.87,90.49 U2.33
  BOTTOM w0.254: J9.4 v1(36.8,91.92)
STM32_REST: length 17.2
  TOP w0.254: v1(62.08,86.36) 61.71,85.99 U2.7 ; v1(61.98,76.99) 62.61,76.99 62.64,77.01 62.71,77.01 62.73,77.03 KS_REST.1 64.17,78.57 64.36,78.77 C9.2
  BOTTOM w0.254: v1(61.98,76.99) 61.98,85.62 62.08,85.73 v1(62.08,86.36)
SWCLK: length 29.5
  TOP w0.254: v1(50.05,78.34) 50.11,78.34 50.11,79.27 50.48,79.64 U2.49
  BOTTOM w0.254: T2.1 57.05,54.99 57.05,56.27 57.04,56.29 JP_SWD1.2 50.11,64.25 50.11,78.34 v1(50.05,78.34)
SWDIO: length 33.8
  TOP w0.254: U2.46 49.52,83.99 49.97,83.54 49.97,83.53 v1(50.42,83.08)
  BOTTOM w0.152: T1.1 54.25,54.58 54.48,54.81
  BOTTOM w0.254: v1(50.42,83.08) 49.4,82.07 49.4,62.42 JP_SWD1.3 54.5,56.29 54.48,56.27 54.48,54.81
USART1_RX_PA10: length 45.5
  TOP w0.254: v1(51.87,84.3) 50.68,85.49 U2.43
  BOTTOM w0.152: 67.72,54.76 67.67,54.71 T4.1
  BOTTOM w0.254: v1(51.87,84.3) 52.32,83.85 52.32,63.84 56.11,60.05 65.01,60.05 JS_USART1.3 67.73,56.29 67.72,56.27 67.72,54.76
USART1_TX_PA9: length 47.7
  TOP w0.254: v1(52.91,84.25) 51.17,85.99 U2.42
  BOTTOM w0.254: v1(52.91,84.25) 52.91,83.62 52.91,83.62 52.91,65.48 57.45,60.93 66.66,60.93 JS_USART1.2 70.27,56.29 70.26,56.27 70.26,55.22 T5.1
USART3_RXD: length 50.3
  TOP w0.254: J4.19 6.74,87.89 12.24,93.4 47.96,93.4 50.24,91.11 51.27,91.11 51.48,91.32 U2.30
USART3_TXD: length 53.7
  TOP w0.254: U2.29 51.98,91.25 51.38,90.65 50.06,90.65 47.8,92.91 12.52,92.91 6.47,86.86 4.81,86.86 J4.20
N201627: length 16.4
  TOP w0.508: D1.3 76.43,70.05 76.25,69.88 v1(76.25,63.53) 76.23,63.5 U3.8 C12.1
  BOTTOM w0.508: T3.1 76.25,61.9 v1(76.25,63.53)
N201649: length 5
  TOP w0.254: C14.2 77.93,61.04 79.32,61.04 ; 79.32,61.04 U3.1 ; 79.32,61.04 Y2.2
N202031: length 5.5
  TOP w0.381: JP_SWD1.4 50.55,57.33 48.64,59.23 R8.1
N202175: length 12.7
  TOP w0.254: C7.2 69.11,88.01 68.66,88.47 Y1.2 64.57,88.47 64.24,88.14 64.24,86.06 63.67,85.49 U2.6
N202187: length 10.6
  TOP w0.254: C8.2 69.42,85.42 68.66,84.66 Y1.1 64.39,84.66 64.06,84.99 U2.5
N202733: length 10.2
  TOP w0.635: JS_BAT1.1 86.79,69.9 86.77,69.88 D1.1
N203157: length 7.9
  TOP w0.254: C13.2 83.21,61.04 Y2.1 81.47,61.95 81.46,61.97 81.46,63.86 80.37,64.95 U3.2
N208876: length 9.4
  TOP w0.635: D3.2 28.6,70.32 28.59,70.31 28.35,70.31 27.03,68.99 L1.2 27.03,66.71 25.74,65.43 25.74,65.42 25.7,65.38 U4.2
N211508: length 35.5
  TOP w0.254: v1(54.46,66.14) 53.58,65.27 U1.1 ; v1(54.71,89.13) 55.35,89.13 55.71,89.49 U2.14
  BOTTOM w0.254: v1(54.46,66.14) 54.46,66.78 54.71,67.03 v1(54.71,89.13)
N214712: length 12.1
  TOP w0.381: J5.1 45.7,58.48 45.72,58.49 45.72,60.93 43.89,62.76 C5.1
  TOP w0.508: C5.1 R1.1 43.64,65.15 43.75,65.27 U1.6
N217465: length 9.8
  TOP w0.254: J8.7 104.56,83.74 103.92,84.38 R7.1
N217476: length 10
  TOP w0.254: J8.6 104.83,87.05 R6.1
N235811: length 17.1
  BOTTOM w0.762: J1.7 80.24,21.93 J2.3
N235857: length 23.3
  BOTTOM w0.762: J1.6 66.94,12.33 66.88,12.39 66.88,15.52 J2.1
N261648: length 55.2
  TOP w0.508: R9.1 18.19,109.4 18.75,109.96 69.24,109.96 69.82,109.37 J9.17
N261718: length 17.5
  TOP w0.508: J9.3 34.32,107.78 34.32,106.43 32.97,105.08 22.07,105.08 20.73,106.42 R9.2
N265241: length 2.6
  TOP w0.254: R14.1 LED1.1
N2654610: length 2.7
  TOP w0.254: LED0.1 R13.1

## Text on the board
Ref Des/Silkscreen Top: LCD | KEY | printer
DIMENSION: FIGURE | SIZE | 14.0 | 35.0 | 43.0 | 47.0 | 60.0 | 177.165 | 55.0 | 90.551x27.559 | DRILL CHART: TOP to BOTTOM | ALL UNITS ARE IN MILS | PLATED | NON-PLATED | QTY | 188 | 19 | 44 | 1 | 9 | 5 | 16 | 8 | 2
